# Altium PCB UNIDOCK SIMPLE_2020-10-20_22-44-36.pcbdoc
Units mil, origin at the board's own origin, x right, y up, seen from the top; angles counter-clockwise.
Board outline 2722.5 x 1995 mil, 2 copper layers (Top Layer, Bottom Layer); 26 components, 29 nets, 130 pads, 63 vias.
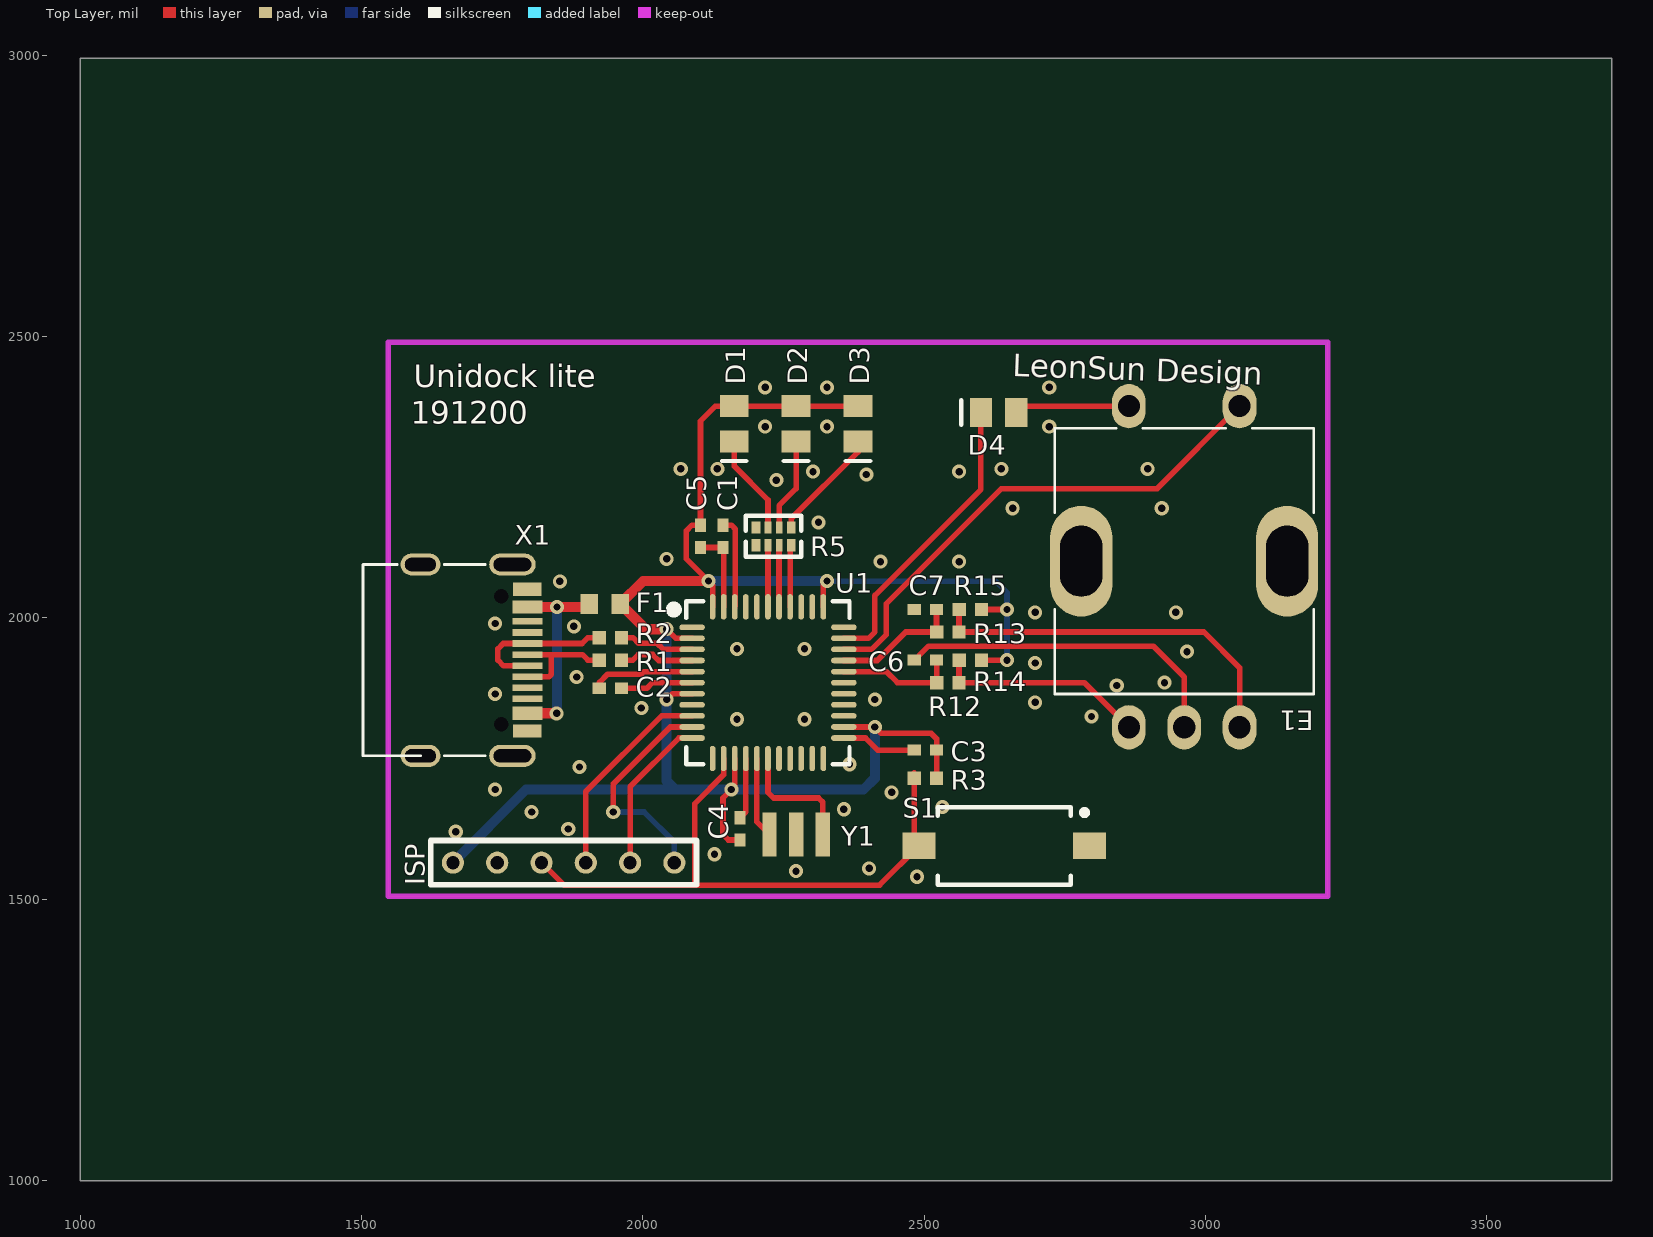
[diagram p0: Top Layer view]
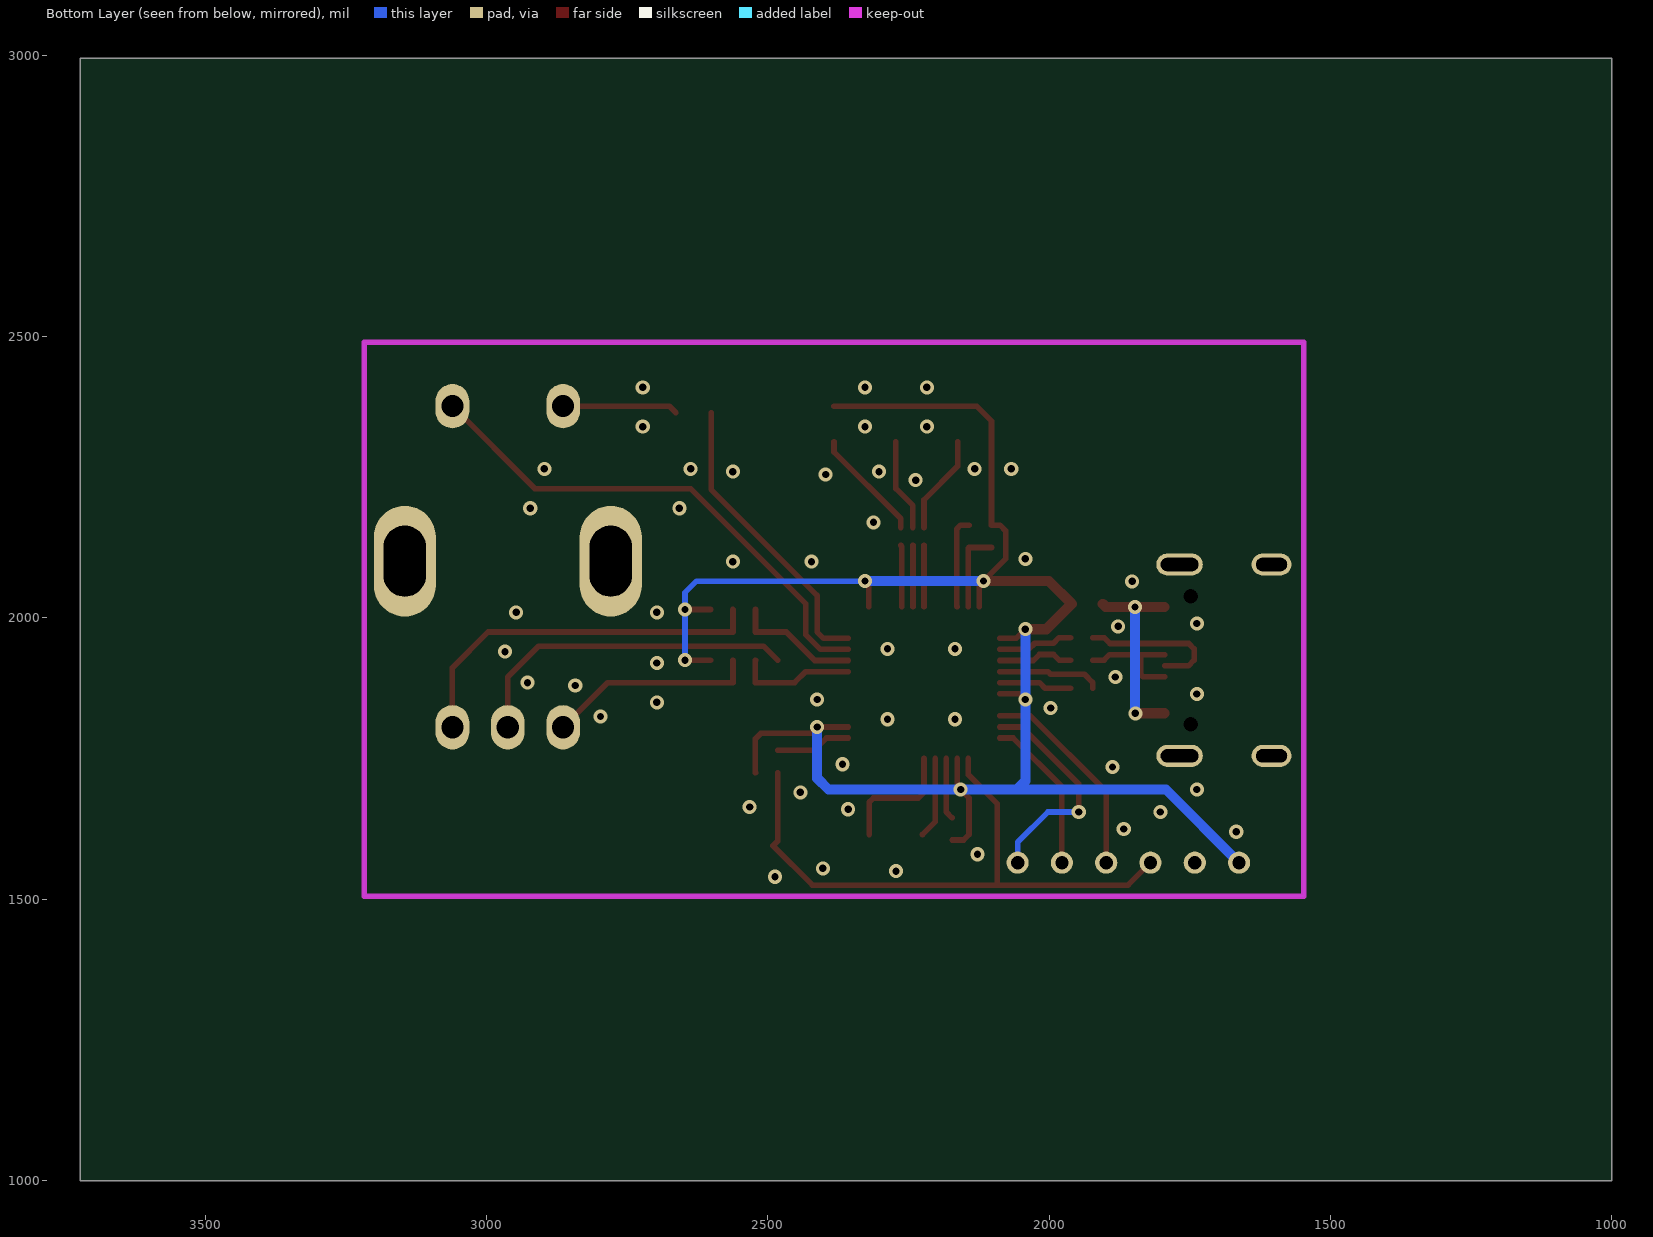
[diagram p1: Bottom Layer view, seen from below]

## Layer stack, top to bottom
Top Layer: signal copper (thickness not stored)
Dielectric: dielectric 12.6, FR-4, Dk 4.8
Bottom Layer: signal copper (thickness not stored)

## Board outline
3722.5,1000 1000,1000 1000,2995 3722.5,2995

## Components (designator, comment, footprint, x,y, rotation, side; value= is the part's Value field where it differs from the comment)
C1 "Cap" CAPC1005L[0402] 2142.5,2145 r90 top
C2 "1uf" CAPC1005L[0402] 1942.5,1875 r180 top
C3 "Cap" CAPC1005L[0402] 2502.5,1765 r180 top
C4 "Cap" CAPC1005L[0402] 2172.5,1625 r90 top
C5 "Cap" CAPC1005L[0402] 2102.5,2145 r270 top
C6 "Cap" CAPC1005L[0402] 2502.5,1925 r0 top
C7 "Cap" CAPC1005L[0402] 2502.5,2015 r0 top
D1 "LED0" DIODE2012L[0805] 2162.5,2345 r270 top
D2 "LED0" DIODE2012L[0805] 2272.5,2345 r270 top
D3 "LED0" DIODE2012L[0805] 2382.5,2345 r270 top
D4 "Diode 1N4148" DIODE2012L[0805] 2632.5,2365 r180 top
E1 "Encode with swithc_EC11" "ENCODE WITH SWITCH-EC11" 2962.5,2095 r180 top
F1 "Fuse 1" CAPC1608L[0603] 1932.5,2025 r0 top
ISP "Header 6" HDR2.0_1*6 1662.5,1565 r0 top
R1 "Res1" RESC1005L[0402] 1942.5,1925 r180 top
R2 "Res1" RESC1005L[0402] 1942.5,1965 r180 top
R3 "Res1" RESC1005L[0402] 2502.5,1715 r180 top
R5 "RES*4" RES*4_0402 2232.5,2145 r180 top
R12 "Res1" RESC1005L[0402] 2542.5,1885 r0 top
R13 "Res1" RESC1005L[0402] 2542.5,1975 r0 top
R14 "Res1" RESC1005L[0402] 2582.5,1925 r0 top
R15 "Res1" RESC1005L[0402] 2582.5,2015 r0 top
S1 "SW-PB" "SW 1*2" 2642.5,1595 r180 top
U1 "ATmega32U4" 44M_M 2222.5,1885 r0 top
X1 "CON_USB_Type_C_2.0" USB_TYPE-C_FEMELE_16P_SMT 1502.5,1925 r270 top
Y1 "Crystal 3P" "CRYSTAL SMD 3215" 2272.5,1615 r270 top

## Footprints (in the part's own frame and the unit in brackets; to place one, negate y for a bottom-side part, rotate by r counter-clockwise, add the part's x,y. Pads: shape width x height; smd on the part's side, far side on the other; paste and mask are expansions set on the pad)
44M_M [mm]
  oval 1.15x0.254 smd: 1(-3.425,2.5) 2(-3.425,2) 3(-3.425,1.5) 4(-3.425,1) 5(-3.425,0.5) 6(-3.425,0) 7(-3.425,-0.5) 8(-3.425,-1) 9(-3.425,-1.5) 10(-3.425,-2) 11(-3.425,-2.5) 23(3.425,-2.5) 24(3.425,-2) 25(3.425,-1.5) 26(3.425,-1) 27(3.425,-0.5) 28(3.425,0) 29(3.425,0.5) 30(3.425,1) 31(3.425,1.5) 32(3.425,2) 33(3.425,2.5)
  oval 0.254x1.15 smd: 12(-2.5,-3.425) 13(-2,-3.425) 14(-1.5,-3.425) 15(-1,-3.425) 16(-0.5,-3.425) 17(0,-3.425) 18(0.5,-3.425) 19(1,-3.425) 20(1.5,-3.425) 21(2,-3.425) 22(2.5,-3.425) 34(2.5,3.425) 35(2,3.425) 36(1.5,3.425) 37(1,3.425) 38(0.5,3.425) 39(0,3.425) 40(-0.5,3.425) 41(-1,3.425) 42(-1.5,3.425) 43(-2,3.425) 44(-2.5,3.425)
  silkscreen extent -4.31,-3.68 3.68,3.68
CAPC1005L[0402] [mm]
  rect 0.6x0.5 smd: 1(-0.5,0) 2(0.5,0)
CAPC1608L[0603] [mm]
  rect 0.8x0.9 smd: 1(-0.7,0) 2(0.7,0)
"CRYSTAL SMD 3215" [mm]
  rect 2x0.65 smd: 1(-0.004,1.2) 2(-0.004,-1.2) 3(-0.004,0)
DIODE2012L[0805] [mil]
  rect 39.37x51.18 smd: 1(-31.5,0) 2(31.5,0)
  silkscreen extent 66,-22 66,22
"ENCODE WITH SWITCH-EC11" [mm]
  oval 2.8x5 hole 1.9 slot 3.2 at 90 deg: 0(-4.65,-0.15) 0(4.65,-0.15)
  oval 1.524x2 hole 1: 1(2.5,7.35) 2(-2.5,7.35) 3(0,7.35) 4(2.5,-7.15) 5(-2.5,-7.15)
  silkscreen extent -5.85,-6.15 5.85,5.85
HDR2.0_1*6 [mm]
  round 1 hole 0.6: 1(0,0) 2(2,0) 3(4,0) 4(6,0) 5(8,0) 6(10,0)
  silkscreen extent -1,-1 11,1
RES*4_0402 [mm]
  rect 0.4x0.55 smd: 1(-0.8,-0.4) 4(0.8,-0.4) 5(-0.8,0.4) 8(0.8,0.4)
  rect 0.3x0.55 smd: 2(-0.25,-0.4) 3(0.25,-0.4) 6(-0.25,0.4) 7(0.25,0.4)
  silkscreen extent -1.25,-0.92 1.25,0.92
RESC1005L[0402] [mm]
  rect 0.6x0.6 smd: 1(-0.5,0) 2(0.5,0)
"SW 1*2" [mm]
  rect 1.5x1.2 smd: 1(-3.85,0) 2(3.85,0)
  silkscreen extent -3.75,-1.75 3,1.75
USB_TYPE-C_FEMELE_16P_SMT [mm]
  oval 1x2.099 hole 0.6 slot 1.7 at 90 deg: 0(-4.32,6.75) 0(4.32,6.75)
  oval 1x1.799 hole 0.6 slot 1.4 at 90 deg: 0(-4.32,2.6) 0(4.32,2.6)
  rect 0.6x1.3 smd: A1(-3.2,7.425) A12(3.2,7.425) B1(3.2,7.425) B12(-3.2,7.425)
  rect 0.6x1.35 smd: A4(-2.4,7.425) A9(2.4,7.425) B4(2.4,7.425) B9(-2.4,7.425)
  rect 0.3x1.35 smd: A5(-1.25,7.425) A6(-0.25,7.425) A7(0.25,7.425) A8(-1.75,7.425) B5(1.75,7.425) B6(0.75,7.425) B7(-0.75,7.425) B8(1.25,7.425)
  round 0.013 hole 0.65: ""(-2.89,6.25) ""(2.89,6.25)
  silkscreen extent -4.33,0 4.32,5.53

## Via types
v1: diameter 25, hole 13, Top Layer to Bottom Layer, 63 vias

## Nets (pads, with @x,y where several pads share a name; then routed paths per layer and width w, separated by ;. In a path a pad name is that pad's centre, name@x,y a point inside that pad or via, vN(x,y) a via of type N, cw(c..) or ccw(c..) an arc to the next point about the centre after c; other vN are vias at no path point)
AREF: C1.2 U1.42 | length 163.5
  Top Layer w10: C1.2 2157.18,2164.68 2157.5,2165 2164.34,2158.16 2164.34,2020.74 U1.42
C6: E1.5 U1.31 | length 914.9
  Top Layer w10: U1.31 2406.55,1944.06 2432.5,1970 2432.5,2025 2637.5,2230 2914.43,2230 E1.5
C7: D4.2 U1.32 | length 527.9
  Top Layer w10: U1.32 2401.24,1963.74 2412.5,1975 2412.5,2040 2601,2228.5 D4.2
D_N: R2.1 U1.3 | length 134.1
  Top Layer w10: R2.1 1982.5,1965 1992.5,1955 2025.78,1955 2036.73,1944.06 U1.3
D_P: R1.1 U1.4 | length 134
  Top Layer w10: R1.1 1982.5,1925 1992.5,1935 2017.5,1935 2028.13,1924.37 U1.4
ENCODEA: C6.2 R12.1 U1.29 | length 213.9
  Top Layer w10: U1.29 2432.82,1904.68 2452.5,1885 R12.1 2522.82,1924.37 C6.2
ENCODEB: C7.2 R13.1 U1.30 | length 227
  Top Layer w10: U1.30 2416.87,1924.37 2467.5,1975 R13.1@2520.85,1975 ; C7.2 2522.18,1976.34 R13.1@2520.85,1975 ; R13.1 R13.1@2520.85,1975
GND: C1.1 C2.2 C3.2 C4.2 C5.2 C6.1 C7.1 E1.0 E1.3 ISP.2 S1.1 U1.5 U1.15 U1.23 U1.33 U1.35 U1.43 X1.0 X1.A1 X1.A12 X1.B1 X1.B12 Y1.3 | length 1175.7
  Top Layer w10: C2.2 1922.82,1885.32 1937.5,1900 1997.5,1900 2002.18,1904.68 U1.5 ; C5.2 C1.1 2143.76,2124.05 U1.43 ; C4.2 2183.13,1655.32 U1.15 ; U1.23 2395.93,1786.58 2417.5,1765 C3.2 ; C6.1 2507.82,1950 2907.5,1950 2962.5,1895 E1.3
  other v1: 2487.5,1540 2272.5,1550 2402.5,1555 2127.5,1580 1667.5,1620 1867.5,1625 1802.5,1655 2357.5,1660 2532.5,1663.9 2442.5,1690 1737.5,1695 1887.5,1735 2367.5,1740 2167.5,1820 2287.5,1820 2797.5,1825 1997.5,1840 2697.5,1850 2412.5,1855 1737.5,1865 2842.5,1880 2927.5,1885 1882.5,1895 2697.5,1920 2967.5,1940 2167.5,1945 2287.5,1945 1877.5,1985 1737.5,1990 2697.5,2010 2947.5,2010 1852.5,2065 2422.5,2100 2562.5,2100 2042.5,2105 2312.5,2170 2657.5,2195 2922.5,2195 2237.5,2245 2397.5,2255 2302.5,2260 2562.5,2260 2067.5,2265 2132.5,2265 2637.5,2265 2897.5,2265 2217.5,2340 2327.5,2340 2722.5,2340 2217.5,2410 2327.5,2410 2722.5,2410
LED1: R5.7 U1.39 | length 109.5
  Top Layer w10: U1.39 2222.5,2129.09 R5.7@2222.66,2129.25
LED2: R5.6 U1.38 | length 109.5
  Top Layer w10: U1.38 2242.18,2129.09 R5.6@2242.34,2129.25
LED3: R5.5 U1.37 | length 110.3
  Top Layer w10: U1.37 2261.87,2127.13 R5.5@2264,2129.25
MISO: ISP.5 U1.11 | length 281
  Top Layer w10: ISP.5 1977.46,1699.96 2064.07,1786.58 U1.11
MOSI: ISP.6 U1.10 | length 399.3
  Top Layer w10: v1(1947.5,1655) 1947.5,1705 2048.76,1806.26 U1.10
  Bottom Layer w10: v1(1947.5,1655) 2002.5,1655 2056.2,1601.3 ISP.6
NETD1_2: D1.2 R5.3 | length 177.7
  Top Layer w10: D1.2 2162.5,2270 2222.66,2209.84 R5.3@2222.66,2160.75
NETD2_2: D2.2 R5.2 | length 165.2
  Top Layer w10: R5.2@2242.34,2160.75 2242.34,2199.84 2272.5,2230 D2.2
NETD3_2: D3.2 R5.1 | length 201.8
  Top Layer w10: R5.1@2264,2160.75 2264,2176.5 2382.5,2295 D3.2
NETD4_1: D4.1 E1.4 | length 204.8
  Top Layer w10: D4.1 2675.49,2376.5 E1.4
NETE1_1: E1.1 R12.2 R14.1 | length 375
  Top Layer w10: R14.1 2562.18,1924.37 R12.2 2784.7,1885 E1.1
NETE1_2: E1.2 R13.2 R15.1 | length 671.2
  Top Layer w10: R15.1 2562.18,2014.37 R13.2 2997.5,1975 3060.93,1911.58 E1.2
NETF1_1: F1.1 X1.A4 X1.A9 X1.B4 X1.B9 | length 353.5
  Top Layer w18: X1.B4 v1(1846.99,1830.51) ; X1.A4 1899.43,2019.49 F1.1
  Bottom Layer w18: v1@1847.5,1830.51 v1(1847.5,2019.49)
NETU1_16: U1.16 Y1.2 | length 144.3
  Top Layer w10: U1.16 2202.82,1637.61 Y1.2
NETU1_17: U1.17 Y1.1 | length 222.1
  Top Layer w10: U1.17 2222.5,1690 2232.5,1680 2312.5,1680 2319.74,1672.76 Y1.1
RESET: ISP.3 R3.2 S1.2 U1.13 | length 1096.3
  Top Layer w10: ISP.3 1859.98,1525 2420.93,1525 S1.2 2482.82,1603.11 R3.2@2482.82,1725 ; 2092.5,1525 2092.5,1670 2143.76,1721.26 U1.13
SCK: ISP.4 U1.9 | length 371
  Top Layer w10: ISP.4 1898.72,1691.22 2033.44,1825.94 U1.9
SS: U1.8
UCAP: C2.1 U1.6 | length 129.6
  Top Layer w10: C2.1 2007.5,1875 2017.5,1885 U1.6
USB_N: R2.2 X1.A7 X1.B7 | length 265.1
  Top Layer w10: X1.A7@1794.82,1914.84 1752.66,1914.84 1742.5,1925 1742.5,1945 1752.03,1954.53 X1.B7 1892.03,1954.53 1902.5,1965 R2.2
USB_P: R1.2 X1.A6 X1.B6 | length 211.1
  Top Layer w10: X1.B6 1832.97,1895.47 1837.5,1900 1837.5,1934.53 ; X1.A6 1892.66,1934.84 1902.5,1925 R1.2
VCC: C3.1 C4.1 C5.1 D1.1 D2.1 D3.1 F1.2 ISP.1 R3.1 R14.2 R15.2 U1.2 U1.7 U1.14 U1.24 U1.34 U1.44 | length 3440.8
  Top Layer w10: v1(2042.5,1855) 2052.82,1865.32 U1.7 ; v1(2042.5,1980) 2058.76,1963.74 U1.2 ; U1.44 2124.07,2058.43 v1(2116.94,2065.56) 2077.5,2105 2077.5,2155 2087.5,2165 2102.18,2165 C5.1 2102.5,2350 2129,2376.5 D1.1 D2.1 D3.1 ; U1.14 2163.45,1700.94 v1(2157.5,1695) 2142.5,1680 2142.5,1615 2152.18,1605.32 C4.1 ; U1.34 2320.93,2058.99 v1(2327.5,2065.56) ; U1.24 v1(2412.5,1806.26) 2423.76,1795 2512.5,1795 2522.5,1785 2522.5,1725.32 R3.1@2522.18,1725 ; R14.2 v1(2647.5,1925) ; R15.2 v1(2647.5,2015)
  Top Layer w18: v1(2042.5,1980) 2005.06,1980 F1.2 2000.62,2065.57 v1(2116.94,2065.56)
  Bottom Layer w10: v1(2327.5,2065.56) 2626.93,2065.57 2647.5,2045 v1(2647.5,1925)
  Bottom Layer w18: ISP.1 1792.5,1695 2057.5,1695 ; v1(2042.5,1980) v1(2042.5,1855) 2042.5,1710 2057.5,1695 ; v1(2116.94,2065.56) v1(2327.5,2065.56) ; v1(2412.5,1806.26) 2412.5,1715 2392.5,1695 v1(2157.5,1695) 2057.5,1695
pads on no net: R5.4 R5.8 U1.1 U1.12 U1.18 U1.19 U1.20 U1.21 U1.22 U1.25 U1.26 U1.27 U1.28 U1.36 U1.40 U1.41 X1. X1.A5 X1.A8 X1.B5 X1.B8

## Polygon pours and split planes (outlines as drawn)
GND on Bottom Layer (solid): 1547.5,2490 1547.5,1505 3217.5,1505 3217.5,2490
GND on Top Layer (solid): 1547.5,2490 1547.5,1505 3217.5,1505 3217.5,2490

## Silkscreen, mask and mechanical layers (free items; w line width, h text height)
Top Overlay:
  text "LeonSun Design" at 2656.8,2430.01 h40 r358
  text "Unidock lite" at 1592.5,2410 h40
  text "191200" at 1587.5,2345 h40
Document:
  lines w0.1: 2360.25,1996.5 2362.25,1998.5